# Allegro board USBCHARGER.brd
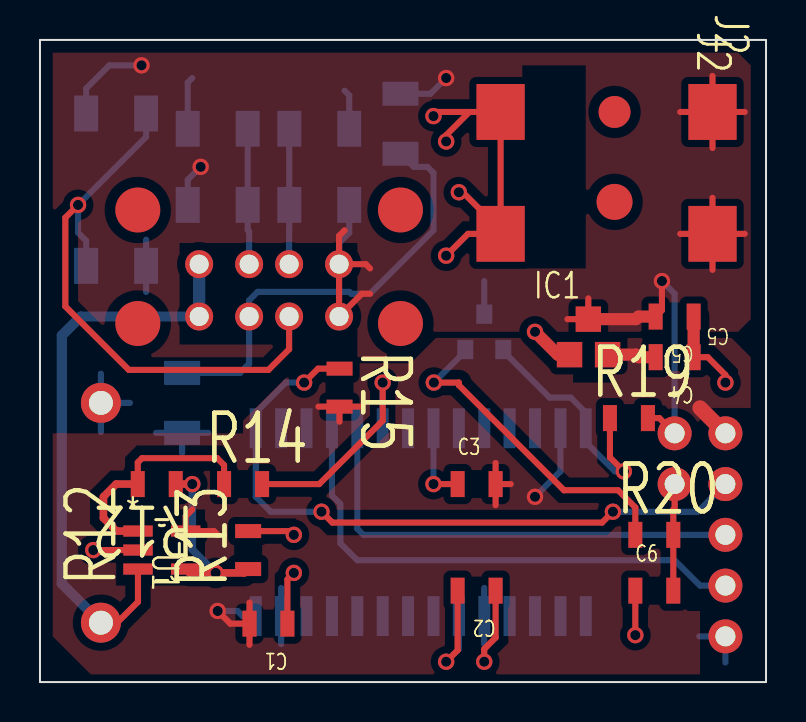
[diagram p0: board, top side]
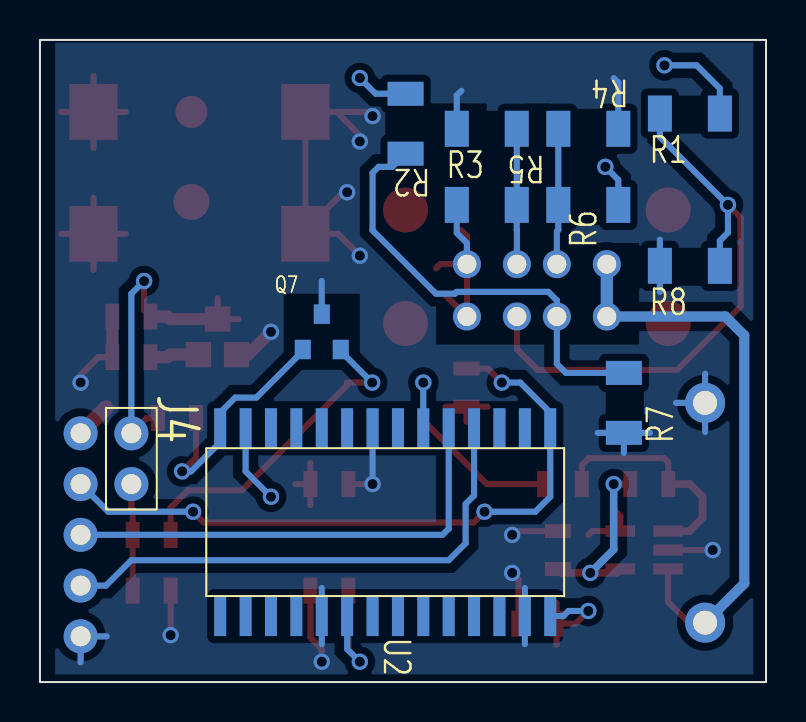
[diagram p1: board, bottom side, seen from below]

Outline 36.32 x 32.13 mm; copper layers: TOP, BOTTOM. Coordinates in mm from the lower left corner of the outline.
Outline path: rectangle 0,0 36.32,32.13

## Design rules (mm)
constraint set DEFAULT: min track width 0.305, pair gap 0.305

## Placement (name value [footprint] x y rotation side)
C1  0.1uF  [SMD_CAP_0805]  11.43 2.92 180 top
C2  10uF  [SMD_CAP_0805]  21.84 4.57 180 top
C3  0.1uF  [SMD_CAP_0805]  21.84 9.91 0 top
C4  10uF  [SMD_CAP_0805]  31.75 16.26 180 top
C5  47uF  [SMD_CAP_0805]  31.75 18.29 180 top
C6  0.1uF  [SMD_CAP_0805]  30.73 4.57 0 top
IC1  -  [MCP1700]  27.43 17.27 90 top
J1  CNC_Tech_1002-004-01010-USBx2  [CNC_TECH_1002-004-01010]  18.03 23.62 180 top
J2  CUI power  [CUI_PJ-002A_SMT]  21.84 33.53 270 top
J3  -  [CONN5]  35.56 1.02 180 bottom
J4  jumper2  [CONN2]  31.75 12.45 270 bottom
NOREF  -  []  18.03 23.62 0 top
Q7  SSM3J328R  [SOT23_N]  22.23 17.53 180 bottom
R1  43K  [SMD_RES_1206]  3.81 28.45 180 bottom
R2  75K  [SMD_RES_1206]  18.03 27.94 90 bottom
R3  51K  [SMD_RES_1206]  13.97 27.69 180 bottom
R4  51K  [SMD_RES_1206]  8.89 27.69 0 bottom
R5  43K  [SMD_RES_1206]  13.97 23.88 0 bottom
R6  75K  [SMD_RES_1206]  8.89 23.88 180 bottom
R7  51K  [SMD_RES_1206]  7.11 13.97 90 bottom
R8  51K  [SMD_RES_1206]  3.81 20.83 180 bottom
R9  .1  [BOURNS-PWR4412-2S]  3.05 13.97 270 top
R12  20k  [SMD_RES_0805]  5.84 9.91 180 top
R13  1k  [SMD_RES_0805]  10.41 6.6 90 top
R14  300  [SMD_RES_0805]  10.16 9.91 0 top
R15  10k  [SMD_RES_0805]  14.99 14.73 270 top
R19  10k  [SMD_RES_0805]  29.46 13.21 0 top
R20  500  [SMD_RES_0805]  30.73 7.37 0 top
U1  OPA336/BB  [DBV5]  6.1 6.6 0 top
U2  PIC32MX150F128B  [SOIC-28]  19.05 8 270 bottom

## Library data of the parts
C1-C6 = C
IC1 = MCP1700
J1 = CNC_Tech_1002-004-01010-USBx2
J2 = CUI power
J3 = CON5
J4 = CON2
Q7 = SSM3J328R P MOSFET SOT23
R1-R9 R12-R15 R19 R20 = R
U1 = OPA336/BB_0
U2 = PIC32MX150F128B

## Footprints (pads in the part's own frame, mm; a bottom-side part is the same pattern mirrored in y, then rotated)
BOURNS-PWR4412-2S
  round 2 hole 1.2: 1(0,0) 2(11,0)
CNC_TECH_1002-004-01010
  round 2.25 smd: (0,5.68) (0,0) (13.14,5.68) (13.14,0)
  round 1.4 hole 0.95: 1(3.07,2.71) 2(5.57,2.71) 3(7.57,2.71) 4(10.07,2.71) 5(3.07,5.33) 6(5.57,5.33) 7(7.57,5.33) 8(10.07,5.33)
CONN2
  round 1.7 hole 1: 1(0,0) 2(2.54,0)
CONN5
  round 1.7 hole 1: 1(1.27,11.43) 2(1.27,8.89) 3(1.27,6.35) 4(1.27,3.81) 5(1.27,1.27)
CUI_PJ-002A_SMT
  round 1.6 smd: (5,6.9)
  round 1.8 smd: (9.5,6.9)
  rect 2.794x2.413 smd: 1(5,11.8) 2(5,1.2) 3(11.1,1.2) 4(11.1,11.8)
DBV5
  rect 1.473x0.559 smd: 1(-1.194,0.95) 2(-1.194,0) 3(-1.194,-0.95) 4(1.194,-0.95) 5(1.194,0.95)
MCP1700
  rect 1.27x1.27 smd: 1(-0.889,0.94) 2(-0.889,-0.965) 3(0.889,0)
SMD_CAP_0805
  rect 0.7x1.3 smd: 1(-0.95,0) 2(0.95,0)
SMD_RES_0805
  rect 0.7x1.3 smd: 1(-0.95,0) 2(0.95,0)
SMD_RES_1206
  rect 1.2x1.8 smd: 1(-1.5,0) 2(1.5,0)
SOIC-28
  rect 2x0.6 smd: 1(-4.7,8.255) 2(-4.7,6.985) 3(-4.7,5.715) 4(-4.7,4.445) 5(-4.7,3.175) 6(-4.7,1.905) 7(-4.7,0.635) 8(-4.7,-0.635) 9(-4.7,-1.905) 10(-4.7,-3.175) 11(-4.7,-4.445) 12(-4.7,-5.715) 13(-4.7,-6.985) 14(-4.7,-8.255) 15(4.7,-8.255) 16(4.7,-6.985) 17(4.7,-5.715) 18(4.7,-4.445) 19(4.7,-3.175) 20(4.7,-1.905) 21(4.7,-0.635) 22(4.7,0.635) 23(4.7,1.905) 24(4.7,3.175) 25(4.7,4.445) 26(4.7,5.715) 27(4.7,6.985) 28(4.7,8.255)
SOT23_N
  rect 0.802x0.972 smd: 1(-0.95,-0.885) 2(0.95,-0.885) 3(0,0.885)

## Nets
3V3: C1.2 C3.2 C4.2 IC1.2(VOUT) J3.1 R15.2 U1.5 U2.13 U2.28
5V: C5.2 IC1.3 J1.1 J1.5 J2.1 J2.4(VIN#4) J4.1 R1.2 R2.2 R5.2 R6.2 R19.2
GND_USB: J1.4 J1.8(VDD#8) R9.2 U1.3
0: C1.1 C2.1 C3.1 C4.1 C5.1 C6.1 IC1.1 J2.2 J2.3 J3.5 Q7.3 R3.1 R4.1 R7.1 R8.1 R9.1 R13.2 U1.2(V-) U2.8(VSS#8) U2.19 U2.27
ADC: R14.2 U2.6
LED: Q7.1 R19.1 U2.14
NMCLR: J3.2 R15.1 U2.1
PGEC: J3.3 U2.5
PGED: J3.4 U2.4
N00611: J1.2 R3.2 R5.1
N292235: R12.2 R14.1 U1.1
N294238: R12.1 R13.1 U1.4
N295022: C2.2 U2.20
N296003: C6.2 J4.2 R20.2
N300445: J1.3 R4.2 R6.1
N301278: J1.6 R1.1 R8.2
N301282: J1.7 R2.1 R7.2
N2957781: Q7.2(S) R20.1

Pads without a net: U2 2 3 7 9 10 11 12 15 16 17 18 21 22 23 24 25 26

## Via types
v1: diameter 0.82, hole 0.508, TOP to BOTTOM, 28 vias

## Routing (per net, layer and track width the routed paths; a pad name or vN(x,y) marks a point on that pad's centre or on a via; arc(x,y) is an arc through that point)
3V3: length 22.8
  TOP w0.305: 22.79,8.85 C3.2 ; C3.2 23.55,9.91 ; C3.2 22.79,10.96 ; C1.2 9.53,2.92 v1(8.89,3.56) ; C1.2 10.48,3.98 ; C1.2 10.48,1.86 ; 14.99,13.03 R15.2 ; R15.2 13.93,13.78 ; R15.2 16.04,13.78 ; 8.89,7.37 8.7,7.55 U1.5 7.29,8.31 7.62,8.64
  TOP w0.61: C4.2 29.94,16.26 29.81,16.38 IC1.2
  TOP w0.762: J3.1 33.02,13.72
  BOTTOM w0.305: U2.28 10.14,3.3 9.88,3.56 v1(8.89,3.56) ; v1(24.77,9.27) 26.04,10.54 U2.13
5V: length 51.2
  TOP w0.305: C5.2 31.12,18.6 v1(31.12,20.07) ; J2.4 33.64,24.23 ; J2.4 32.03,22.43 ; J2.4 35.26,22.43 ; J2.4 33.64,20.62 ; 26.39,18.16 IC1.3 27.43,19.2 ; J2.1 35.26,28.53 ; J2.1 32.03,28.53 ; J2.1 33.64,30.33 ; J2.1 33.64,26.72 ; R19.2 30.99,13.21 J4.1 ; 16.51,19.43 16.1,19.43 J1.5 J1.1 ; J1.1 16.3,20.91 16.51,20.7 ; J1.1 14.96,22.33 15.24,22.61
  TOP w0.61: C5.2 29.94,18.29 29.81,18.16 IC1.3
  BOTTOM w0.305: J4.1 31.75,19.43 v1(31.12,20.07) ; R2.2 19.53,29.44 v1(20.32,30.23) ; v1(8.04,25.78) 7.39,25.13 R6.2 ; R1.2 2.31,29.7 3.47,30.86 v1(5.08,30.86) ; R5.2 15.47,22.47 14.96,21.97 J1.1
GND_USB: length 29
  TOP w0.305: R9.2 3.86,2.97 4.9,4.01 U1.3
  BOTTOM w0.508: J1.8 2.04,18.29 1.09,17.34 1.09,4.93 R9.2
  BOTTOM w0.61: J1.4 J1.8
0: length 66.6
  TOP w0.305: 21.48,28.53 J2.2 23.04,22.62 ; 21.48,28.53 20.32,27.37 v1(20.32,27.05) ; 21.48,28.53 19.89,28.53 v1(19.69,28.32) ; v1(12.7,5.46) 12.38,5.14 C1.1 ; C4.1 33.41,16.26 34.29,15.37 v1(34.29,14.99) ; C6.1 v1(29.78,2.35) ; 23.04,22.62 21.15,24.51 v1(20.96,24.51) ; 23.04,22.62 J2.3 21.41,22.43 v1(20.32,21.34) ; C2.1 22.79,2.22 22.23,1.65 v1(22.23,1.02) ; R13.2 12.51,7.55 v1(12.7,7.37) ; C3.1 v1(19.69,9.91) ; U1.2 v1(2.67,6.6)
  TOP w0.61: C4.1 C5.1 ; v1(24.77,17.53) 25.91,16.38 IC1.1
  BOTTOM w0.305: R3.1 15.47,29.36 15.24,29.59 ; 12.06,4.71 U2.27 12.06,1.89 ; 7.62,30.23 7.39,30 R4.1 ; Q7.3 22.23,20.07 ; 32.98,2.29 J3.5 34.29,0.98 ; 22.23,1.89 U2.19 22.23,4.71 ; 3.05,12.51 R9.1 ; R9.1 4.51,13.97 ; R9.1 3.05,15.43 ; 5.31,19.52 R8.1 5.31,22.13 ; U2.8 v1(19.69,9.91) ; R7.1 8.42,12.47 ; R7.1 7.11,11.46 ; R7.1 5.81,12.47
ADC: length 11.5
  TOP w0.305: R14.2 13.97,9.91 17.15,13.08 v1(17.15,14.99)
  BOTTOM w0.305: v1(17.15,14.99) U2.6
LED: length 12.4
  TOP w0.305: v1(29.21,10.54) 28.51,11.24 R19.1
  BOTTOM w0.305: v1(29.21,10.54) 28.76,10.54 27.31,12 U2.14 27.31,13.49 26.56,14.23 25.5,14.23 23.18,16.56 Q7.1
NMCLR: length 34.1
  TOP w0.305: R15.1 13.91,15.68 v1(13.21,14.99) ; v1(28.66,8.52) 28.12,7.98 14.62,7.98 v1(14.08,8.52)
  BOTTOM w0.305: J3.2 32.91,8.52 v1(28.66,8.52) ; v1(13.21,14.99) 12.3,14.99 10.8,13.49 U2.1 10.8,9.27 11.54,8.52 v1(14.08,8.52)
PGEC: length 23.6
  BOTTOM w0.305: J3.3 16.18,7.37 15.88,7.67 U2.5
PGED: length 26.1
  BOTTOM w0.305: U2.4 14.61,9.34 15.03,8.91 15.03,6.94 15.88,6.1 31.75,6.1 33.02,4.83 J3.4
N00611: length 6.8
  BOTTOM w0.305: J1.2 12.46,22.61 12.47,22.62 R5.1 R3.2
N292235: length 11.6
  TOP w0.305: R12.2 4.89,10.99 5.11,11.2 8.86,11.2 9.21,10.86 R14.1
  TOP w0.381: R12.2 3.81,9.91 3.18,9.27 3.18,8.21 3.83,7.55 U1.1
N294238: length 9
  TOP w0.381: R12.1 v1(7.62,9.91) ; R13.1 10.22,5.46 v1(8.79,5.46) 7.48,5.46 U1.4
  BOTTOM w0.381: v1(8.79,5.46) 7.62,6.63 v1(7.62,9.91)
N295022: length 6.3
  TOP w0.305: v1(20.32,1.02) 20.89,1.59 C2.2
  BOTTOM w0.305: 20.96,3.3 20.96,1.65 v1(20.32,1.02)
N296003: length 5.4
  TOP w0.305: C6.2 R20.2 31.68,8.63 31.75,8.7 J4.2
N300445: length 6.8
  BOTTOM w0.305: J1.3 10.46,22.55 10.39,22.62 R6.1 R4.2
N301278: length 29.1
  TOP w0.305: J1.6 12.46,16.66 11.43,15.62 4.44,15.62 1.27,18.8 1.27,23.24 v1(1.91,23.88)
  BOTTOM w0.305: R1.1 5.31,27.28 v1(1.91,23.88) 1.91,22.49 2.31,22.08 R8.2
N301282: length 22.4
  BOTTOM w0.305: R2.1 18.69,25.78 19.38,25.78 19.69,25.48 19.69,22.61 16.51,19.43 15.57,19.43 15.47,19.53 10.89,19.53 10.46,19.1 J1.7 10.46,15.93 10.01,15.47 R7.2
N2957781: length 16.4
  TOP w0.305: R20.1 29.78,8.74 28.92,9.6 26.21,9.6 20.96,14.86 20.96,14.99 v1(19.7,14.99)
  BOTTOM w0.305: Q7.2 21.27,16.56 v1(19.7,14.99)

## Copper pours and planes (outline as drawn; the poured copper is in the pictures)
3V3 on TOP: 2.54,0.38 0.63,2.29 0.63,12.45 10.16,12.45 10.16,13.08 13.34,16.26 18.42,16.26 19.69,17.53 26.67,17.53 26.67,14.99 28.57,14.99 28.57,17.53 34.29,17.53 35.56,16.26 35.56,13.72 33.02,13.72 33.02,9.27 32.38,9.27 32.38,3.56 33.02,3.56 33.02,0.38 ; 3 cut-outs
5V on TOP: 0.63,13.08 0.63,31.5 34.93,31.5 35.56,30.86 35.56,18.16 34.93,17.53 19.69,17.53 18.42,16.26 15.88,16.26 15.88,21.97 6.99,21.97 6.99,16.89 12.7,16.89 12.7,16.26 9.53,13.08 ; 2 cut-outs
0 on BOTTOM: 0.63,0.38 0.63,32 35.56,32 35.56,0.38 ; 6 cut-outs
